# EAGLE board LB_BIT_1IN_2OUT-XXXL-v03(1_1x) (EAGLE 6.5.0)
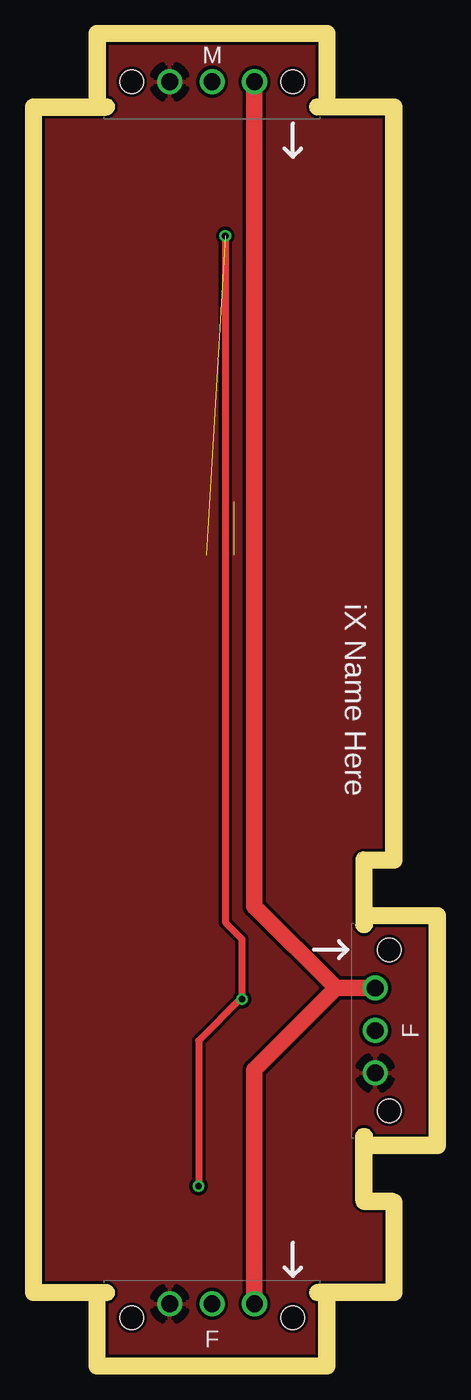
[diagram p0: board, top side]
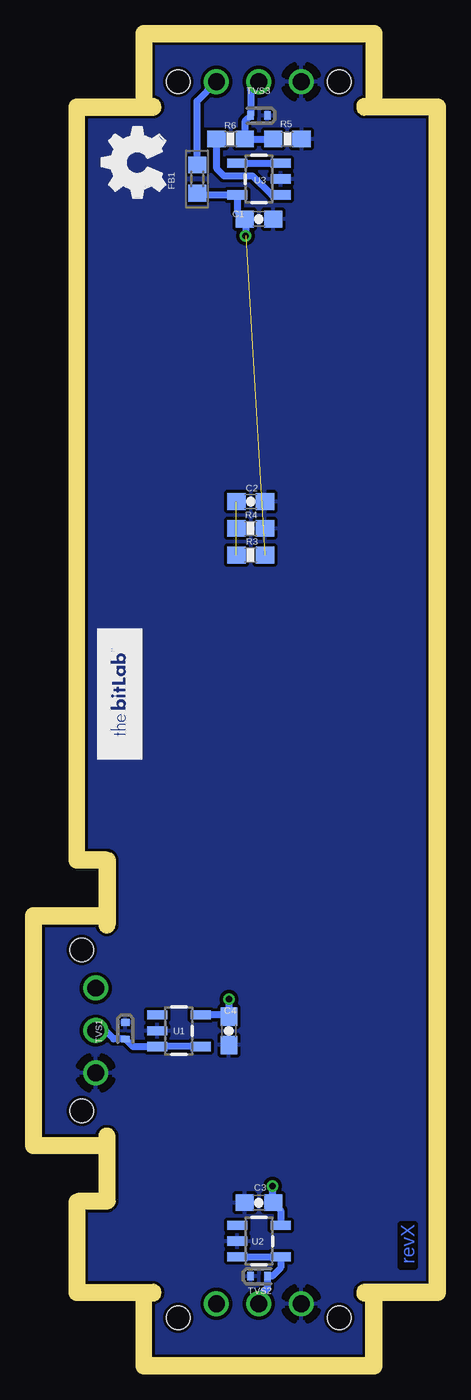
[diagram p1: board, bottom side, seen from below]

Size 23.2 x 78.84 mm. Coordinates in mm from the lower left corner, seen from the top.
Outline: 18.8,9.41 arc90 19.3,8.91 20.62,8.91 20.62,4.4 20.4,4.4
Outline: 18.8,29.8 arc-90 19.3,30.3 20.61,30.3 20.61,74.44 20.23,74.44
Outline: 0,74.44 0,4.4 0.03,4.4
Copper layers (1*16): Top 0.035mm / dielectric 1.5mm / Bottom 0.035mm
Design rules "littleBitsDRC": minimum track width 0.2mm, minimum drill 0.4mm, track to track 0.2mm, track to pad 0.2mm, pad to pad 0.2mm, via to via 0.2mm, smd to smd 0mil, copper to edge 0.2mm, drill to drill 0.2mm, minimum pad ring 0.2mm, minimum via ring 0.15mm, stop-mask expansion 0.1mm, vias tented up to drill 0mil, thermal gap 0.2mm
Milling: 13 lines

## Footprints (pad centres in the part's own frame; a part is rotated, then mirrored left to right if it is on the bottom)
BITSNAP_V03_FEMALE = drill 1: GND 4.065,3.44; SIG 6.605,3.44; VCC 9.145,3.44 | hole 1.4: 1.785,2.61; 11.425,2.61
BITSNAP_V03_MALE = drill 1: GND1 9.145,2.61; SIG1 6.605,2.61; VCC1 4.065,2.61 | hole 1.4: 1.785,2.61; 11.425,2.61
CAP-0603 = smd 1.1 x 1: 1 -0.85,0; 2 0.85,0
R0603 = smd 1 x 1.1: 1 -0.85,0; 2 0.85,0
RES-0603 = smd 1.1 x 1: 1 -0.85,0; 2 0.85,0
SOD-923 = smd 0.4 x 0.5: 1 -0.5,0; 2 0.5,0
SOT23-5 = smd 0.55 x 1.2: 1 -0.95,-1.3; 2 0,-1.3; 3 0.95,-1.3; 4 0.95,1.3; 5 -0.95,1.3

## Placement (x,y rotation side)
BSF1  BITSNAP_V03_FEMALE  [BITSNAP_V03_FEMALE]  3.6,-0.21 0 top
BSF2  BITSNAP_V03_FEMALE  [BITSNAP_V03_FEMALE]  23.41,13 90 top
BSM1  BITSNAP_V03_MALE  [BITSNAP_V03_MALE]  16.8,79.05 180 top
C1  0.1uF  [CAP-0603]  10.19,68.22 0 bottom
C2  10uF  [CAP-0603]  10.69,51.29 0 bottom
C3  1.0uF  [CAP-0603]  10.19,9.29 0 bottom
C4  1.0uF  [CAP-0603]  11.99,19.59 90 bottom
FB1  FERRITE-BEAD0603  [R0603]  13.89,70.61 90 bottom
FRAME1  FRAME-LETTER  [FABDWG01-OHW]  -3.01,19.61 0 top  (outside the outline)
R3  3K3  [RES-0603]  10.69,48.09 0 bottom
R4  3K3  [RES-0603]  10.69,49.69 180 bottom
R5  1meg  [RES-0603]  8.49,73.02 180 bottom
R6  10K  [RES-0603]  11.89,73.02 0 bottom
TVS1  ESD9B5.0ST5G  [SOD-923]  18.19,19.59 270 bottom
TVS2  ESD9B5.0ST5G  [SOD-923]  10.19,4.89 0 bottom
TVS3  ESD9B5.0ST5G  [SOD-923]  10.19,74.42 180 bottom
U1  LV321SOT23-5  [SOT23-5]  14.99,19.59 270 bottom
U2  LV321SOT23-5  [SOT23-5]  10.19,6.99 270 bottom
U3  LV321SOT23-5  [SOT23-5]  10.19,70.61 90 bottom
U$1  OSHW-LOGOL  [OSHW-LOGO-L]  -36.03,-45.98 0 top  (outside the outline)
U$2  OSHWCREDIT  [OSHWCREDIT]  -90.01,-38.94 0 top  (outside the outline)
U$3  [BITLAB-LOGO]  17.19,43.69 270 top
U$8  [OSHW_FILLX150_NOTEXT]  15.8,68.65 0 top

## Library data of the parts
BSF1 BSF2 BSM1 = bitSnap
C1-C4 FB1 FRAME1 R3-R6 U1-U3 U$2 U$3 = LITTLEBITS
TVS1-TVS3 = LITTLEBITS; IEC_ESD_PROT0: +/-18kV; LB_PN: ?; MPN: ESD9B5.0ST5G; V_CLAMP: ?; V_OPERATION: 5V
U$1 = LITTLEBITS131206
U$8 = ohw-logo

## Nets
GND: BSF1.GND BSF2.GND BSM1.GND1 C1.2 C2.2 C3.1 C4.1 R4.1 R5.1 TVS1.1 TVS2.1 TVS3.1 U1.2 U2.2 U3.2
LB_VCC: BSF1.VCC BSF2.VCC BSM1.VCC1 FB1.2
N$1: U3.3 U3.4
N$2: U1.1
N$3: U2.1
N$5: R6.1 U3.1
SIG1_OUT: BSF1.SIG TVS2.2 U2.3 U2.4
SIG2_OUT: BSF2.SIG TVS1.2 U1.3 U1.4
SIG_IN: BSM1.SIG1 R5.2 R6.2 TVS3.2
VCC: C1.1 C3.2 C4.2 FB1.1 R3.2 U1.5 U2.5 U3.5
VREF: C2.1 R3.1 R4.2

## Tracks (layer width: path | path; a pad name or v marks a point on that pad's centre or on a via)
GND
  pour Bottom: -0.01,0.07 23.19,0.07 23.19,79 -0.01,79
  pour Top: -0.01,0.07 23.19,0.07 23.19,79 -0.01,79
LB_VCC
  Top 1: BSM1.VCC1 12.74,27.04 17.63,22.14 | 17.63,22.14 BSF2.VCC | BSF1.VCC 12.74,17.25 17.63,22.14
  Bottom 0.406: FB1.2 13.89,75.29 BSM1.VCC1
N$1
  Bottom 0.406: U3.4 U3.3
N$5
  Bottom 0.406: R6.1 12.74,71.27 12.29,70.81 10.59,70.81 9.44,69.67 U3.1
SIG1_OUT
  Bottom 0.406: U2.3 U2.4 8.89,5.39 9.39,4.89 TVS2.2 9.69,4.19 10.2,3.68 BSF1.SIG
SIG2_OUT
  Bottom 0.406: U1.4 U1.3 17.74,18.64 TVS1.2 18.89,19.09 19.41,19.61 BSF2.SIG
SIG_IN
  Bottom 0.406: BSM1.SIG1 10.69,75.95 TVS3.2 11.04,74.06 R6.2 R5.2
VCC  (via drill 0.4)  (1 unrouted)
  Top 0.406: v10.99,67.22 10.99,26.09 11.99,25.09 11.99,21.59 | 11.99,21.59 v11.99,21.49 | 11.99,21.59 9.39,18.99 v9.39,10.29
  Bottom 0.406: FB1.1 13.79,69.67 U3.5 11.49,68.67 C1.1 10.99,68.17 v10.99,67.22 | v11.99,21.49 C4.2 12.09,20.54 U1.5 | v9.39,10.29 9.39,9.34 C3.2 8.89,8.84 U2.5
VREF  (2 unrouted)

## Text on the board
Bottom: revX
tPlace: iX Name Here